# EAGLE board drv (EAGLE 9.1.0)
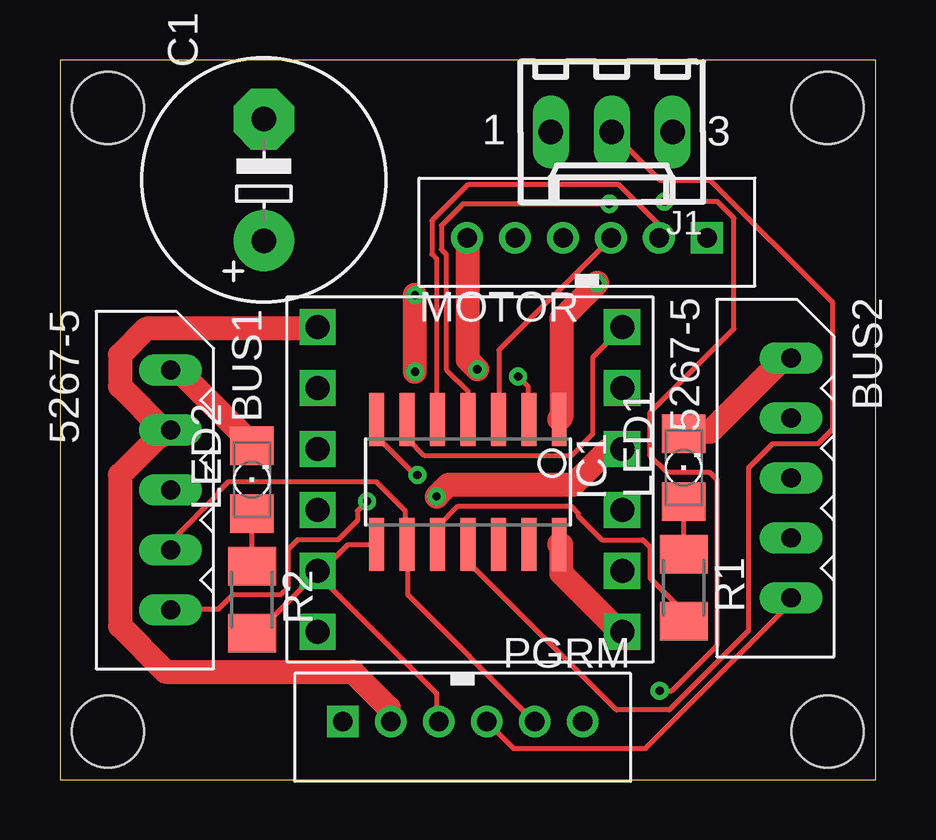
[diagram p0: board, top side]
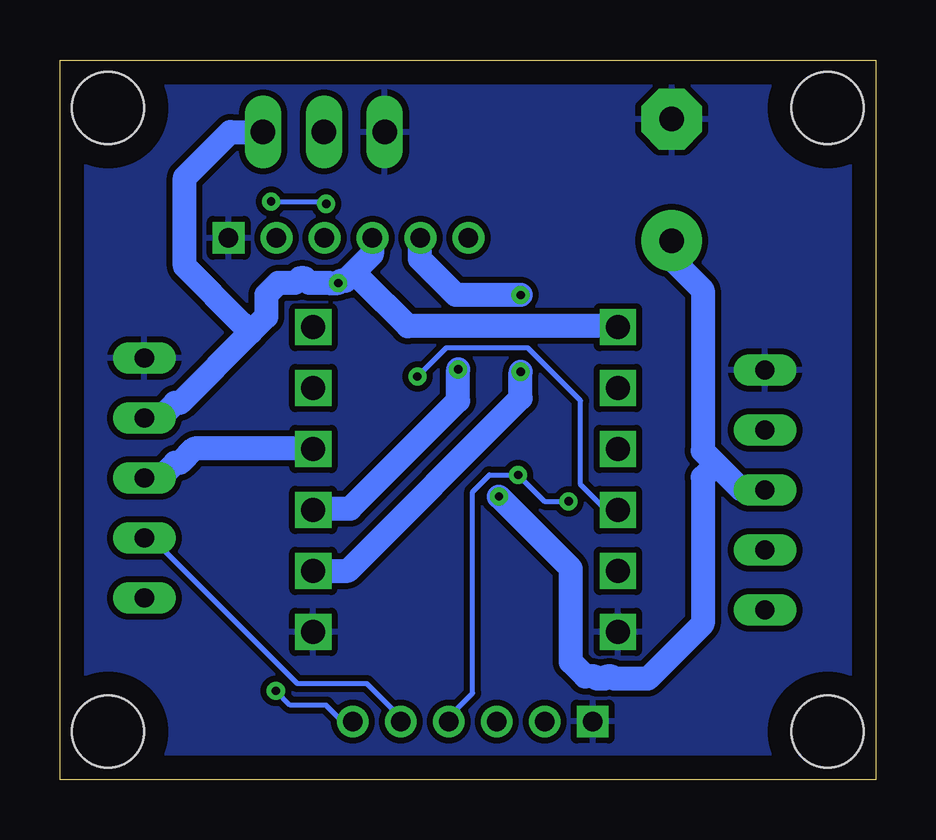
[diagram p1: board, bottom side, seen from below]

Size 34 x 30 mm. Coordinates in mm from the lower left corner, seen from the top.
Outline: 0,0 34,0 34,30 0,30 0,0
Copper layers (1*16): Top 0.035mm / dielectric 1.5mm / Bottom 0.035mm
Design rules "default *": minimum track width 6mil, minimum drill 0.35mm, track to track 0.2mm, track to pad 0.3mm, pad to pad 0.3mm, via to via 0.3mm, smd to smd 0.2mm, copper to edge 1mm, drill to drill 0.5mm, minimum pad ring 10mil, minimum via ring 8mil, stop-mask expansion 4mil, vias tented up to drill 0mil, thermal gap 10mil
Net classes: 0 default: width 0.2 mm, clearance 0.1 mm; 1 pwr: width 1 mm, clearance 0.25 mm; 2 5v: width 0.4 mm, clearance 0.2 mm
Holes 3 mm at 2,2 2,28 32,2 32,28

## Footprints (pad centres in the part's own frame; a part is rotated, then mirrored left to right if it is on the bottom)
5267-5 = drill 0.8 long: P$1 0,0; P$2 2.5,0; P$3 5,0; P$4 7.5,0; P$5 10,0
E5-10,5 = drill 1.016 pad 2.54: + -2.54,0 | drill 1.016 pad 2.54 octagon: - 2.54,0
SOIC14 = smd 0.61 x 2.21: 1 -3.81,-2.603; 2 -2.54,-2.603; 3 -1.27,-2.603; 4 0,-2.603; 5 1.27,-2.603; 6 2.54,-2.603; 7 3.81,-2.603; 8 3.81,2.603; 9 2.54,2.603; 10 1.27,2.603; 11 0,2.603; 12 -1.27,2.603; 13 -2.54,2.603; 14 -3.81,2.603
6410-03 = drill 1.016 long: 1 2.54,0; 2 0,0; 3 -2.54,0
1206 = smd 1.6 x 1.803: A -1.422,0; C 1.422,0
B6B-PH-K-S = drill 0.813 square: 1 5,0 | drill 0.813: 2 3,0; 3 1,0; 4 -1,0; 5 -3,0; 6 -5,0
M1206 = smd 1.6 x 2: 1 -1.4,0; 2 1.4,0
DRV8801BR = drill 1 square: BRAKE 1.27,11.43; CS 13.97,11.43; DIR 1.27,6.35; FAULT 13.97,13.97; GDN 1.27,1.27; GND 13.97,1.27; OUT+ 13.97,3.81; OUT- 13.97,6.35; PWM 1.27,3.81; SLEEP 1.27,8.89; VDD 1.27,13.97; VMM 13.97,8.89

## Placement (x,y rotation side)
BUS1  5267-5  [5267-5]  4.61,17.07 270 top
BUS2  5267-5  [5267-5]  30.48,17.57 270 top
C1  100uf  [E5-10,5]  8.5,25 90 top
IC1  TINY24/44/84-SSU  [SOIC14]  17.01,12.41 180 top
J1  22-27-2031-03  [6410-03]  23,27 180 top
LED1  RED  [1206]  26,13 90 top
LED2  GREEN  [1206]  8,12.5 90 top
MOTOR  6PIN  [B6B-PH-K-S]  21.97,22.58 0 top
PGRM  6PIN  [B6B-PH-K-S]  16.79,2.42 180 top
R1  1k  [M1206]  26,8 270 top
R2  1k  [M1206]  8,7.5 270 top
U$1  DRV8801BR  [DRV8801BR]  9.47,4.89 0 top

## Library data of the parts
BUS1 BUS2 = con-molex-spox
C1 = rcl; SPICEPREFIX: C
IC1 = avr-7
J1 = con-molex; MF: MOLEX; OC_FARNELL: unknown; OC_NEWARK: unknown
LED1 LED2 = led
MOTOR PGRM = jst_eph
R1 R2 = rcl; SPICEPREFIX: R
U$1 = pololu

## Nets
5V [pwr]: BUS1.P$2 BUS2.P$2 IC1.1 J1.3 MOTOR.4 PGRM.2 U$1.VDD
12V [pwr]: BUS1.P$3 BUS2.P$3 C1.+ U$1.VMM
CLKS: BUS1.P$4 BUS2.P$4 IC1.9 PGRM.5
DIR: IC1.2 U$1.DIR
ENC1: IC1.5 MOTOR.2
ENC2: IC1.3 MOTOR.3
FAULT: IC1.6 U$1.FAULT
GND [pwr]: BUS1.P$1 BUS2.P$1 C1.- IC1.14 J1.1 LED1.C LED2.C MOTOR.1 PGRM.1 U$1.GDN U$1.GND
HBLED: IC1.10 R1.2
M1 [pwr]: MOTOR.5 U$1.OUT+
M2 [pwr]: MOTOR.6 U$1.OUT-
N$6: LED1.A R1.1
N$7: LED2.A R2.1
PWM/MISO: IC1.8 PGRM.3 R2.2 U$1.PWM
RESET: IC1.4 PGRM.6
SDA/MOSI: BUS1.P$5 BUS2.P$5 IC1.7 PGRM.4
SENSOR1: IC1.11 J1.2

## Tracks (layer width: path | path; a pad name or v marks a point on that pad's centre or on a via)
5V  (via drill 0.35)
  Top 1: v22.4,20.7 20.9,19.2 20.9,15.1 IC1.1 | U$1.VDD 10.7,18.8 3.6,18.8 2.5,17.7 2.5,16.4 4.3,14.6 4.6,14.6 BUS1.P$2 4,14.2 2.5,12.7 2.5,6.4 4.4,4.5 12.2,4.5 13.7,3 13.7,2.5 PGRM.2
  Bottom 1: 21.75,21.15 21,21.9 21,22.5 MOTOR.4 | 21.75,21.15 22.1,20.8 22.3,20.8 v22.4,20.7 22.8,20.7 23.6,20.7 23.8,20.9 24,20.9 24.2,20.7 24.9,20.7 25.4,20.2 25.4,19.3 26.05,18.65 | 26.05,18.65 29,15.7 29.2,15.7 29.8,15.1 30.4,15.1 BUS2.P$2 | J1.3 25.6,27 26.9,27 28.8,25.1 28.8,21.4 26.4,19 26.05,18.65 | 21.75,21.15 21.4,20.8 19.5,18.9 10.8,18.9 U$1.VDD
12V  (via drill 0.35)
  Top 1: v15.7,11.8 16.2,12.3 21.4,12.3 22.8,13.7 23.4,13.7 U$1.VMM
  Bottom 1: BUS2.P$3 30.4,12.6 29.8,12.6 29.2,13.2 29,13.2 28.4,13.8 23.5,13.8 U$1.VMM | 6.65,13.15 7.2,13.7 7.2,20.4 8.5,21.7 8.5,22.4 C1.+ | 6.65,13.15 5.6,12.1 4.7,12.1 BUS1.P$3 | v15.7,11.8 12.7,8.8 12.7,4.9 12.1,4.3 11.7,4.3 11.6,4.2 11.3,4.2 11.2,4.3 11,4.3 10.9,4.2 9.5,4.2 7.2,6.5 7.2,12.6 7,12.8 6.65,13.15
CLKS
  Top 0.2: PGRM.5 19.7,2.5 14.5,7.7 14.5,9.8 IC1.9 14.4,9.9 14.4,11.2 13.2,12.4 7,12.4 6.6,12 6.6,11.9 4.7,10 4.7,9.6 BUS1.P$4
  Bottom 0.2: BUS2.P$4 30.4,10 30.1,10 24.1,4 21.2,4 19.7,2.5 PGRM.5
DIR  (via drill 0.35)
  Top 0.2: v19.1,16.8 19.5,16.4 19.5,15.1 IC1.2
  Bottom 0.2: v19.1,16.8 17.9,18 14.5,18 12.3,15.8 12.3,12.3 11.3,11.3 10.8,11.3 U$1.DIR
ENC1
  Top 0.2: IC1.5 15.7,15.1 15.7,21.7 15.5,21.9 15.5,23.3 17,24.8 23.3,24.8 24.9,23.2 24.9,22.6 MOTOR.2
ENC2
  Top 0.2: IC1.3 18.3,15.1 18.3,17.9 22.9,22.5 MOTOR.3
FAULT
  Top 0.2: IC1.6 14.5,15 14.5,14.2 15.2,13.5 21.3,13.5 22.2,14.4 22.2,17.6 23.4,18.8 U$1.FAULT
GND
  Top 1: LED2.C 8,14 5,17 4.7,17 BUS1.P$1 | LED1.C 26,14.5 27.1,14.5 30.1,17.5 30.4,17.5 BUS2.P$1 | IC1.14 20.9,9.8 20.9,8.6 23.4,6.1 U$1.GND
  pour Bottom: -2,32.5 -2,-2.5 -1.5,-3 39.5,-3 41.5,-1 41.5,32.5
HBLED
  Top 0.2: R1.2 26,7 24.6,8.4 24.6,9.7 24.3,10 22.6,10 21.6,11 21.6,11.1 21.3,11.4 16.6,11.4 15.8,10.6 15.8,9.9 IC1.10
M1  (via drill 0.35)
  Top 1: v14.8,17 v14.8,20.2
  Bottom 1: v14.8,20.2 17.5,20.2 19,21.7 19,22.5 MOTOR.5 | v14.8,17 14.8,15.9 22,8.7 23.4,8.7 U$1.OUT+
M2  (via drill 0.35)
  Top 1: v17.4,17.1 17,17.5 17,22.5 MOTOR.6
  Bottom 1: v17.4,17.1 17.4,15.8 21.9,11.3 23.4,11.3 U$1.OUT-
N$6
  Top 0.2: R1.1 26,11.5 LED1.A
N$7
  Top 0.2: R2.1 8,11 LED2.A
PWM/MISO
  Top 0.2: R2.2 8.2,6.1 10.8,8.7 U$1.PWM | IC1.8 12,9.8 10.8,8.6 U$1.PWM | PGRM.3 15.7,2.5 15.7,3.6 10.8,8.5 U$1.PWM
RESET  (via drill 0.35)
  Top 0.2: v22.9,24 16.8,24 15.9,23.1 15.9,22.1 16.1,21.9 16.1,17.1 17,16.2 17,15.1 IC1.4 | v25.2,24.1 27.4,24.1 28.1,23.4 28.1,18.8 24.6,15.3 24.6,13.5 25.3,12.8 27.1,12.8 27.4,12.5 27.4,5.6 25.5,3.7 v25,3.7
  Bottom 0.2: v22.9,24 23,24.1 v25.2,24.1 | v25,3.7 24.4,3.1 22.9,3.1 22.3,2.5 21.8,2.5 PGRM.6
SDA/MOSI  (via drill 0.35)
  Top 0.2: v14.9,12.7 14.8,12.7 13.2,14.3 IC1.7 | v12.8,11.6 12.4,11.2 12.4,10.8 11.6,10 9.9,10 9.5,9.6 9.5,8 9.2,7.7 7.2,7.7 6.6,7.1 4.7,7.1 BUS1.P$5 | BUS2.P$5 30.4,7.5 30.4,7.3 24.4,1.3 18.9,1.3 17.8,2.4 PGRM.4
  Bottom 0.2: PGRM.4 17.7,2.5 17.7,2.7 16.8,3.6 16.8,12 16.1,12.7 v14.9,12.7 13.8,11.6 v12.8,11.6
SENSOR1
  Top 0.2: J1.2 25,25 27.1,25 32.2,19.9 32.2,14.6 31.6,14 29.7,14 28.7,13 28.7,6.2 25.4,2.9 23.2,2.9 17.1,9 17.1,9.8 IC1.11